# EAGLE board PCB-BRD mvs (EAGLE 7.6.0)
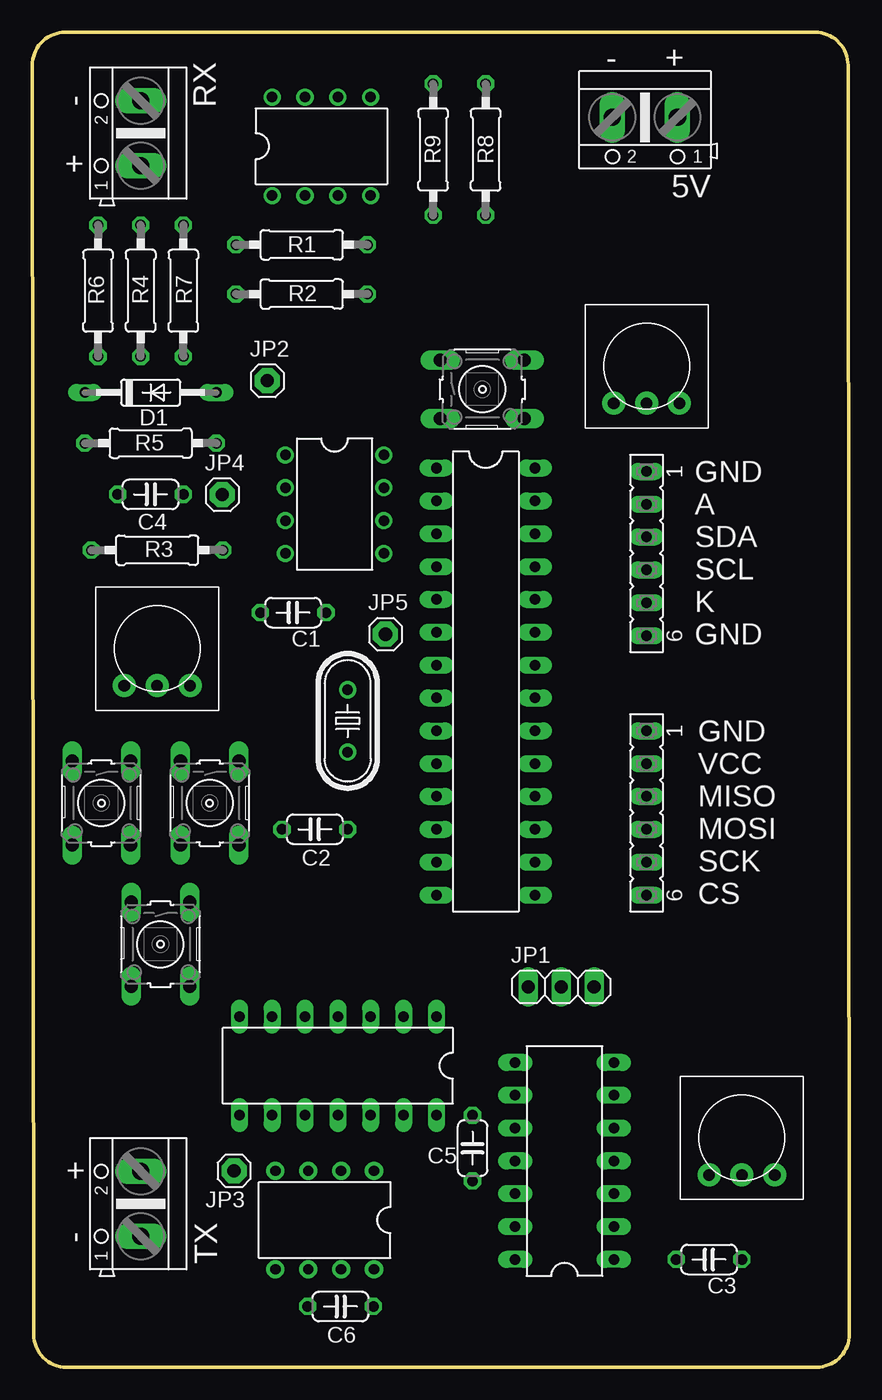
[diagram p0: board, top side]
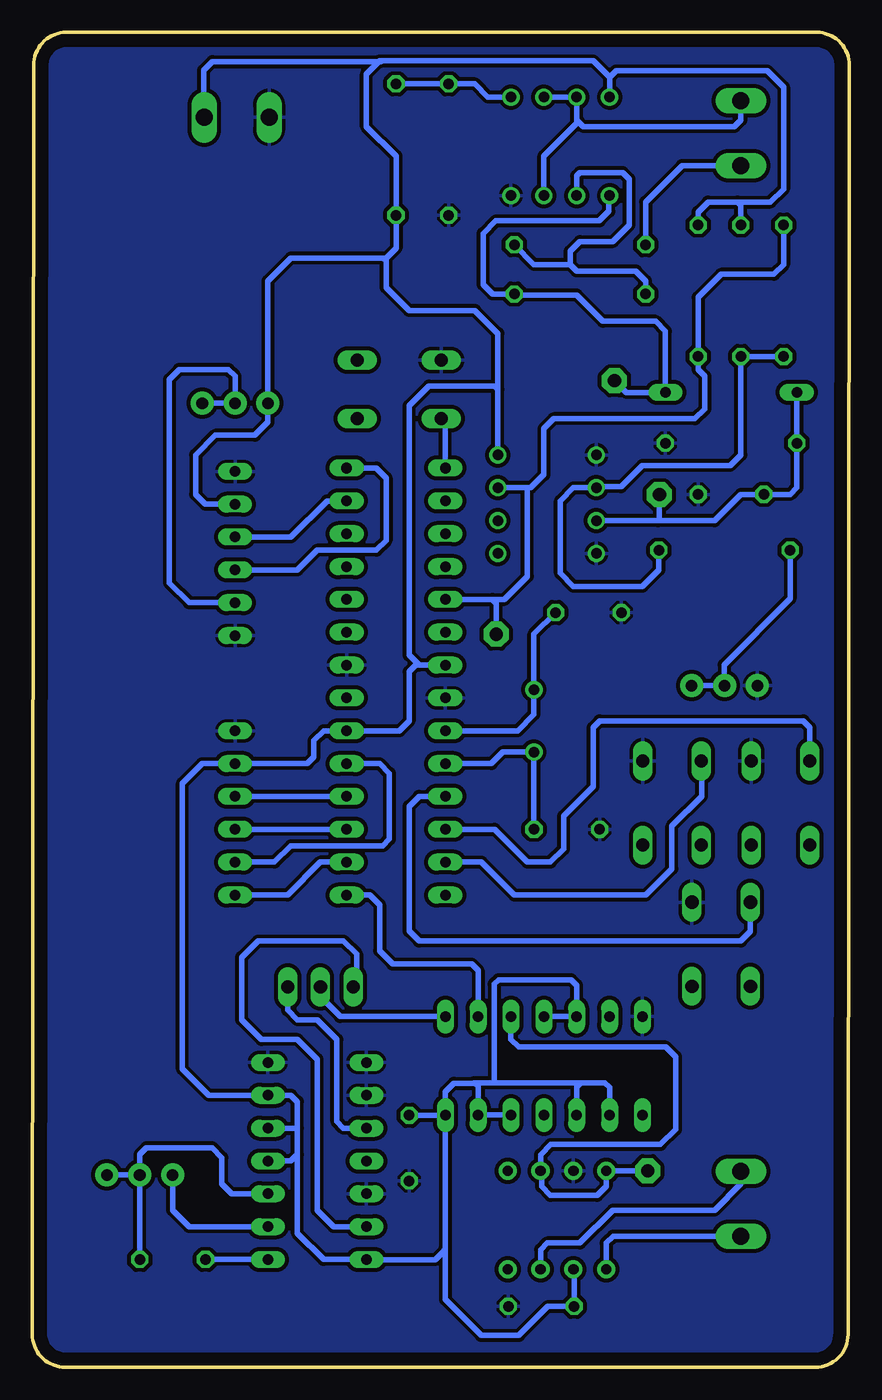
[diagram p1: board, bottom side, seen from below]

Size 63.17 x 103.25 mm. Coordinates in mm from the lower left corner, seen from the top.
Outline: 0,100.71 0.1,2.54 arc90 2.64,0 60.63,0 arc90 63.17,2.54 63.07,100.71 arc90 60.53,103.25 2.54,103.25 arc90 0,100.71
Copper layers (1*16): Top 0.035mm / dielectric 1.5mm / Bottom 0.035mm
Design rules "default *": minimum track width 10mil, minimum drill 24mil, track to track 8mil, track to pad 8mil, pad to pad 8mil, via to via 8mil, smd to smd 8mil, copper to edge 40mil, drill to drill 8mil, minimum pad ring 10mil, minimum via ring 8mil, stop-mask expansion 10mil, vias tented up to drill 0mil, thermal gap 10mil

## Footprints (pad centres in the part's own frame; a part is rotated, then mirrored left to right if it is on the bottom)
AK500/2 = drill 1.321 long: 1 -2.515,0; 2 2.515,0
C050-024X044 = drill 0.813 octagon: 1 -2.54,0; 2 2.54,0
DO35-10 = drill 0.813 long: A 5.08,0; C -5.08,0
DIL28-3 = drill 0.813 long: 1 -16.51,-3.81; 2 -13.97,-3.81; 3 -11.43,-3.81; 4 -8.89,-3.81; 5 -6.35,-3.81; 6 -3.81,-3.81; 7 -1.27,-3.81; 8 1.27,-3.81; 9 3.81,-3.81; 10 6.35,-3.81; 11 8.89,-3.81; 12 11.43,-3.81; 13 13.97,-3.81; 14 16.51,-3.81; 15 16.51,3.81; 16 13.97,3.81; 17 11.43,3.81; 18 8.89,3.81; 19 6.35,3.81; 20 3.81,3.81; 21 1.27,3.81; 22 -1.27,3.81; 23 -3.81,3.81; 24 -6.35,3.81; 25 -8.89,3.81; 26 -11.43,3.81; 27 -13.97,3.81; 28 -16.51,3.81
DIL14 = drill 0.813 long: 1 -7.62,-3.81; 2 -5.08,-3.81; 3 -2.54,-3.81; 4 0,-3.81; 5 2.54,-3.81; 6 5.08,-3.81; 7 7.62,-3.81; 8 7.62,3.81; 9 5.08,3.81; 10 2.54,3.81; 11 0,3.81; 12 -2.54,3.81; 13 -5.08,3.81; 14 -7.62,3.81
DIL08 = drill 0.813 pad 1.27: 1 -3.81,-3.81; 2 -1.27,-3.81; 3 1.27,-3.81; 4 3.81,-3.81; 5 3.81,3.81; 6 1.27,3.81; 7 -1.27,3.81; 8 -3.81,3.81
DIL08' = drill 0.8 pad 1.4: 1 -3.81,-3.81; 2 -1.27,-3.81; 3 1.27,-3.81; 4 3.81,-3.81; 5 3.81,3.81; 6 1.27,3.81; 7 -1.27,3.81; 8 -3.81,3.81
1X03 = drill 1.016 long: 1 -2.54,0; 2 0,0; 3 2.54,0
1X01 = drill 1.016 pad 1.93 octagon: 1 0,0
FE06 = drill 0.813 long: 1 -6.35,0; 2 -3.81,0; 3 -1.27,0; 4 1.27,0; 5 3.81,0; 6 6.35,0
HC49U-V = drill 0.813: 1 -2.413,0; 2 2.413,0
0207/10 = drill 0.813 octagon: 1 -5.08,0; 2 5.08,0
B3F-10XX = drill 1.016 long: 1 -3.251,2.261; 2 3.251,2.261; 3 -3.251,-2.261; 4 3.251,-2.261
TRIM-3386 = drill 0.9 pad 1.778: 1 -2.54,-2.857; 2 0,-2.857; 3 2.54,-2.857

## Placement (x,y rotation side)
5V  [AK500/2]  47.37,96.67 180 top
C1  22p  [C050-024X044]  20.17,58.37 180 top
C2  22p  [C050-024X044]  21.84,41.61 180 top
C3  1n  [C050-024X044]  52.32,8.33 180 top
C4  1n  [C050-024X044]  9.14,67.51 0 top
C5  0.1u  [C050-024X044]  34.04,16.94 270 top
C6  1u  [C050-024X044]  23.83,4.7 0 top
D1  1N4148DO35-10  [DO35-10]  9.14,75.39 0 top
IC1  ATMEGA168-20P  [DIL28-3]  35.05,53.04 270 top
IC2  4047N  [DIL14]  41.15,15.95 90 top
IC3  LM358N  [DIL08]  22.35,94.44 0 top
IC4  74HC00N  [DIL14]  23.62,23.32 180 top
IC5  IR4428  [DIL08']  22.61,11.38 180 top
IC6  LM311N  [DIL08]  23.37,66.75 270 top
JP1  [1X03]  40.89,29.41 0 top
JP2  [1X01]  18.16,76.3 0 top
JP3  [1X01]  15.6,15.19 0 top
JP4  [1X01]  14.68,67.49 0 top
JP5  [1X01]  27.3,56.69 0 top
PINESLCD  [FE06]  47.5,62.94 270 top
PINESSD  [FE06]  47.5,42.88 270 top
Q1  16M  [HC49U-V]  24.38,49.99 270 top
R1  1k  [0207/10]  20.83,86.82 0 top
R2  100k  [0207/10]  20.83,83.01 0 top
R3  10k  [0207/10]  9.65,63.2 0 top
R4  10k  [0207/10]  8.38,83.26 90 top
R5  1M  [0207/10]  9.14,71.48 180 top
R6  100k  [0207/10]  5.08,83.26 90 top
R7  1k  [0207/10]  11.68,83.26 90 top
R8  100k  [0207/10]  35.05,94.18 90 top
R9  100k  [0207/10]  30.99,94.18 90 top
RX  [AK500/2]  8.38,95.45 90 top
S1  [B3F-10XX]  34.8,75.64 0 top
S2  [B3F-10XX]  9.91,32.72 270 top
S3  [B3F-10XX]  5.33,43.64 270 top
S4  [B3F-10XX]  13.72,43.64 270 top
TM1  10k  [TRIM-3386]  54.86,17.73 0 top
TM2  1k  [TRIM-3386]  47.5,77.42 0 top
TM3  50k  [TRIM-3386]  9.65,55.58 0 top
TX  [AK500/2]  8.38,12.65 90 top

## Library data of the parts
5V RX TX = con-ptr500; OC_FARNELL: unknown; OC_NEWARK: unknown
C1-C6 R1-R9 = rcl
D1 = diode
IC1 JP2-JP5 TM1-TM3 = adafruit
IC2 = 40xx
IC3 IC6 = linear
IC4 = 74xx-eu
IC5 = ir; MF: INTERNATIONAL RECTIFIER(IR); MPN: IR4428PBF; OC_FARNELL: 1023268; OC_NEWARK: 19K8464
JP1 = pinhead
PINESLCD PINESSD = con-lsta; OC_FARNELL: unknown; OC_NEWARK: unknown
Q1 = crystal; OC_FARNELL: 1666969; OC_NEWARK: unknown
S1-S4 = switch-omron; MPN: B3F-1000; OC_FARNELL: 176432; OC_NEWARK: 36M3542

## Nets
+5V: 5V.1 C5.1 C6.1 IC1.7 IC1.20 IC2.4 IC2.5 IC2.6 IC2.14 IC3.8 IC4.4 IC4.5 IC4.9 IC4.10 IC4.12 IC4.13 IC4.14 IC5.6 IC6.8 PINESLCD.2 PINESSD.2 R4.2 R7.2 R8.1 TM2.1
GND: 5V.2 C1.2 C2.2 C4.2 C5.2 C6.2 IC1.8 IC1.22 IC2.7 IC2.8 IC2.9 IC2.12 IC3.4 IC4.7 IC5.3 IC6.1 IC6.4 PINESLCD.1 PINESLCD.6 PINESSD.1 R5.1 R9.1 S1.1 S2.1 S3.1 S4.1 TM3.1
MOD: IC1.15 IC4.2
N$1: IC2.10 JP1.3
N$2: IC2.13 JP1.1
N$3: IC4.1 JP1.2
N$5: IC2.2 TM1.1
N$6: IC5.7 TX.2
N$7: IC5.5 TX.1
N$9: R1.1 RX.1
N$10: IC3.2 R1.2 R2.1
N$11: C1.1 IC1.9 Q1.1
N$13: IC6.2 R3.2 R4.1 R6.1
N$14: C3.2 IC2.1
N$15: R3.1 TM3.2 TM3.3
N$16: C3.1 IC2.3 TM1.2 TM1.3
N$17: C2.1 IC1.10 Q1.2
N$18: IC4.3 IC5.2 IC5.4 JP3.1
N$19: D1.A IC3.1 JP2.1 R2.2
N$20: IC3.5 R8.2 R9.2
N$21: IC1.17 PINESSD.4
N$22: IC1.18 PINESSD.3
N$23: IC1.1 S1.3
N$24: C4.1 D1.C IC6.3 JP4.1 R5.2
N$25: IC1.19 PINESSD.5
N$26: IC1.16 PINESSD.6
N$27: IC1.27 PINESLCD.3
N$28: IC1.28 PINESLCD.4
N$29: PINESLCD.5 TM2.2 TM2.3
PIN11: IC1.11 S2.3
PIN12: IC1.12 S3.3
PIN13: IC1.13 S4.3
RXOUT: IC1.5 IC6.7 JP5.1 R6.2 R7.1
VREF: IC3.3 IC3.6 IC3.7 RX.2

## Tracks (layer width: path | path; a pad name or v marks a point on that pad's centre or on a via)
+5V
  Bottom 0.406: IC2.4 43.18,15.95 42.67,16.46 | 42.67,16.46 42.67,18.49 | 42.67,18.49 42.67,20.52 43.18,21.03 IC2.6 49.53,21.03 51.56,23.06 51.56,45.16 50.04,46.69 PINESSD.2 41.91,46.69 41.4,47.19 41.4,48.46 40.64,49.23 IC1.20 34.8,49.23 34.04,49.99 34.04,53.8 33.53,54.31 IC1.7 33.27,54.31 34.04,55.07 34.04,74.37 32.51,75.9 27.43,75.9 27.18,75.64 | IC2.5 42.67,18.49 | 42.67,16.46 42.67,10.36 40.64,8.33 IC2.14 37.31,8.31 32.03,8.31 31.32,9.02 31.32,9.09 31.24,9.09 | IC4.14 31.24,9.09 | R7.2 11.68,89.36 10.92,90.12 8.64,90.12 | 8.64,90.12 6.1,90.12 5.08,91.14 5.08,99.01 6.35,100.28 18.03,100.28 18.54,99.77 | R4.2 8.38,89.87 8.64,90.12 | IC3.8 18.54,99.77 | 36.17,101.04 36.32,101.04 37.34,100.03 37.34,95.96 35.05,93.68 R8.1 35.05,86.56 35.81,85.8 36.07,85.8 | 36.17,101.04 19.81,101.04 18.54,99.77 | PINESLCD.2 49.78,66.75 50.55,67.51 50.55,70.56 49.02,72.09 45.97,72.09 44.96,73.1 TM2.1 44.96,84.02 43.18,85.8 36.07,85.8 | IC6.8 27.18,75.64 | 27.18,75.64 27.18,79.96 28.96,81.74 34.04,81.74 35.81,83.52 35.81,85.55 36.07,85.8 | 5V.1 49.94,100.3 49.25,100.99 36.22,100.99 36.17,101.04 | IC4.4 IC4.5 21.08,29.54 21.51,29.97 27.13,29.97 27.46,29.64 27.46,22.05 27.41,22 | IC4.14 31.24,21.31 30.58,21.97 29.03,21.97 | 29.03,21.97 28.96,21.97 28.7,21.72 IC4.13 IC4.12 | IC4.9 18.54,21.64 18.9,22 20.78,22 | 20.78,22 21.08,21.69 IC4.10 | 20.78,22 27.41,22 | 27.41,22 29.01,22 29.03,21.97 | C5.1 31.27,19.48 IC4.14 | IC5.6 21.29,7.52 C6.1 23.32,4.7 25.55,2.46 28.47,2.46 31.24,5.23 31.24,9.09
GND
  pour Bottom (isolate 0.305): -4.83,105.11 72.9,105.11 72.9,104.85 72.9,-0.81 -4.83,-0.81
MOD
  Bottom 0.406: IC1.15 37.08,36.53 36.32,35.76 36.32,32.21 35.31,31.19 29.21,31.19 28.7,30.68 IC4.2
N$1
  Bottom 0.406: IC2.10 39.12,18.49 39.62,19 39.62,25.35 41.15,26.87 42.67,26.87 43.43,27.64 JP1.3
N$2
  Bottom 0.406: IC2.13 39.88,10.87 41.15,12.14 41.15,23.83 42.67,25.35 45.47,25.35 46.99,26.87 46.99,31.7 45.72,32.97 39.12,32.97 38.1,31.95 38.1,29.67
  Bottom 0.61: 38.1,29.67 JP1.1
N$3
  Bottom 0.406: IC4.1 39.37,27.13 40.64,28.4 40.64,29.16
  Bottom 0.61: 40.64,29.16 JP1.2
N$5
  Bottom 0.406: IC2.2 51.05,10.87 52.32,12.14 TM1.1
N$6
  Bottom 0.406: TX.2 8.38,14.17 10.41,12.14 18.29,12.14 20.83,9.6 23.37,9.6 23.88,9.09 IC5.7
N$7
  Bottom 0.406: TX.1 18.26,10.13 18.8,9.6 IC5.5
N$9
  Bottom 0.406: RX.1 12.93,92.94 15.75,90.12 R1.1
N$10
  Bottom 0.406: R2.1 15.75,84.02 16.51,84.79 21.08,84.79 21.59,85.29 | 21.59,85.29 24.38,85.29 R1.2 | 21.59,85.29 21.59,86.31 20.83,87.07 18.29,87.07 17.02,88.34 17.02,91.9 17.53,92.41 20.83,92.41 21.08,92.15 IC3.2
N$11
  Bottom 0.406: IC1.9 25.65,49.23 24.38,50.5 Q1.1 24.38,56.69 C1.1
N$13
  Bottom 0.406: R6.1 R4.1 8.38,70.56 8.41,70.56 9.22,69.75 16,69.75 17.65,68.1 19.48,68.1 IC6.2 21.34,68.02 22.35,67.01 22.35,61.42 21.34,60.4 16,60.4 14.73,61.67 R3.2
N$14
  Bottom 0.406: IC2.1 C3.2
N$15
  Bottom 0.406: R3.1 4.57,59.44 9.68,54.33 9.68,52.74 TM3.2 TM3.3
N$16
  Bottom 0.406: IC2.3 47.75,13.41 48.51,14.17 48.51,16.21 49.28,16.97 54.36,16.97 54.86,16.46 TM1.2 | C3.1 TM1.2 | TM1.2 TM1.3
N$17
  Bottom 0.406: C2.1 Q1.2 26.8,47.57 27.69,46.69 IC1.10
N$18
  Bottom 0.406: IC4.3 26.16,25.35 25.58,24.77 14.2,24.77 13.44,24 13.44,18.39 14.61,17.22 23.09,17.22 23.88,16.43 IC5.2 23.8,15.11 23.8,13.97 23.11,13.28 19.51,13.28 18.8,14 IC5.4 JP3.1
N$19
  Bottom 0.406: JP2.1 17.25,75.39 D1.A 14.22,80.14 14.99,80.9 19.05,80.9 21.08,82.93 25.83,82.93 R2.2 27.58,83.01 28.32,83.74 28.32,87.68 27.33,88.67 19.33,88.67 18.59,89.41 18.59,90.58 IC3.1
N$20
  Bottom 0.406: R8.2 R9.2 28.96,99.26 27.94,98.25 IC3.5
N$21
  Bottom 0.406: IC1.17 PINESSD.4
N$22
  Bottom 0.406: IC1.18 PINESSD.3
N$23
  Bottom 0.406: IC1.1 31.24,73.08
  Bottom 0.61: 31.24,73.08 S1.3
N$24
  Bottom 0.406: D1.C R5.2 4.06,68.02 4.57,67.51 C4.1 8.38,67.51 10.41,65.48 14.78,65.48 | 19.53,65.46 IC6.3 14.78,65.48 | JP4.1 14.68,65.58 14.78,65.48
N$25
  Bottom 0.406: IC1.19 36.32,46.69 35.56,45.92 35.56,40.84 36.07,40.34 43.18,40.34 44.45,39.07 PINESSD.5
N$26
  Bottom 0.406: IC1.16 40.89,39.07 43.43,36.53 PINESSD.6
N$27
  Bottom 0.406: IC1.27 40.39,67.01 43.18,64.21 PINESLCD.3
N$28
  Bottom 0.406: IC1.28 36.58,69.55 35.81,68.78 35.81,63.96 36.58,63.2 41.15,63.2 42.67,61.67 PINESLCD.4
N$29
  Bottom 0.406: PINESLCD.5 51.05,59.13 52.58,60.66 52.58,76.4 51.82,77.17 48.01,77.17 47.5,76.66 TM2.2 TM2.3
PIN11
  Bottom 0.406: S2.3 7.64,33.71 8.38,32.97 33.27,32.97 34.04,33.73 34.04,43.38 33.27,44.15 IC1.11
PIN12
  Bottom 0.406: IC1.12 27.43,41.61 24.89,39.07 23.11,39.07 22.1,40.08 22.1,42.62 19.81,44.91 19.81,49.48 19.3,49.99 3.56,49.99 3.05,49.48 3.05,47.42
  Bottom 0.61: 3.05,47.42 S3.3
PIN13
  Bottom 0.406: IC1.13 28.45,39.07 25.91,36.53 15.75,36.53 13.72,38.56 13.72,41.86 11.43,44.15 11.43,46.86 S4.3 11.43,47.37
RXOUT
  Bottom 0.406: R6.2 5.08,85.29 5.84,84.53 9.91,84.53 11.68,82.75 R7.1 11.68,77.17 11.18,76.66 11.18,74.12 11.94,73.36 22.86,73.36 23.62,72.59 23.62,69.04 24.64,68.02 24.89,68.02 | 24.89,68.02 IC6.7 | IC1.5 27.61,59.39 | 27.61,59.39 26.67,59.39 24.89,61.16 24.89,68.02 | JP5.1 27.3,59.08 27.61,59.39
VREF
  Bottom 0.406: IC3.6 IC3.7 21.08,96.47 20.95,96.34 | RX.2 8.38,96.47 8.89,95.96 20.57,95.96 20.95,96.34 | IC3.3 23.62,93.68 20.95,96.34

## Text on the board
tNames: - | + | - | + | GND / A / SDA / SCL / K / GND | GND / VCC / MISO / MOSI / SCK / CS | + | -